# Altium PCB RGB_Ring_PCB.PcbDoc
Units mm, origin at the board's own origin, x right, y up, seen from the top; angles counter-clockwise.
Board outline 30.25 x 44.05 mm, 2 copper layers (Top Layer, Bottom Layer), stack 1.571 mm thick; 18 components, 12 nets, 57 pads, 6 vias.
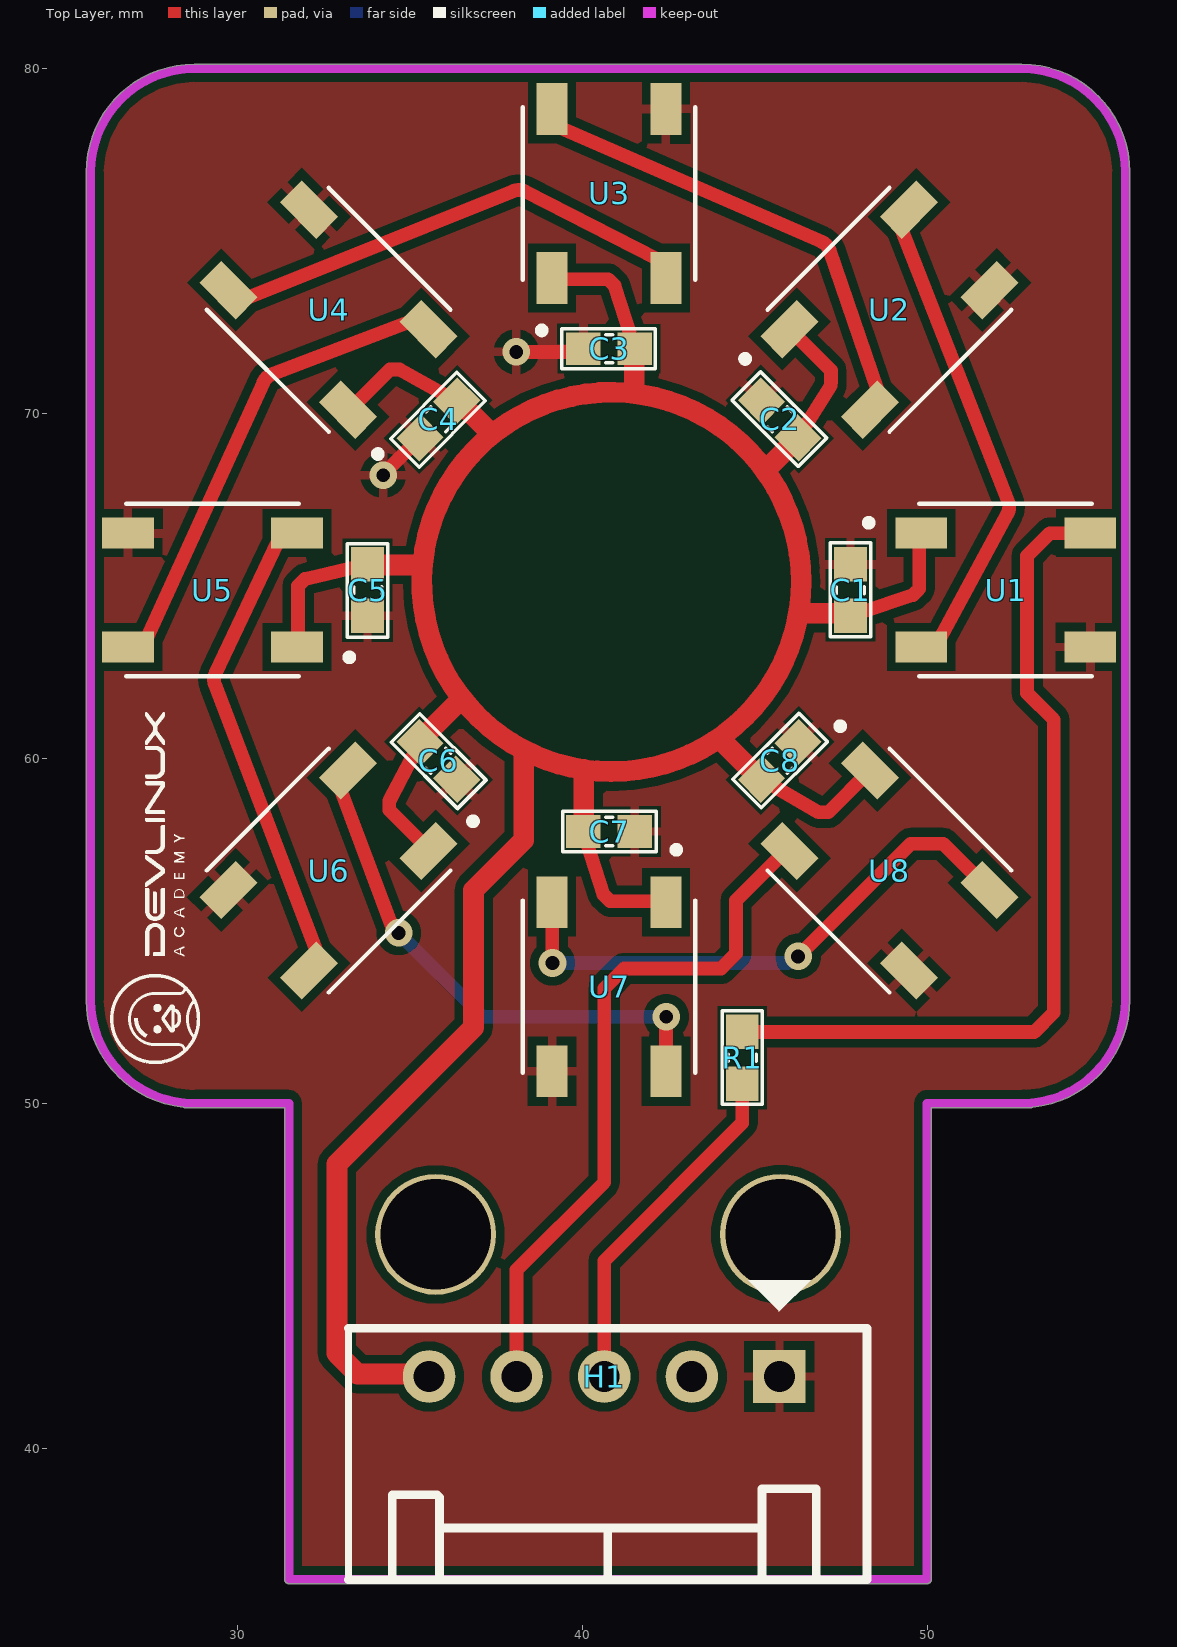
[diagram p0: Top Layer view]
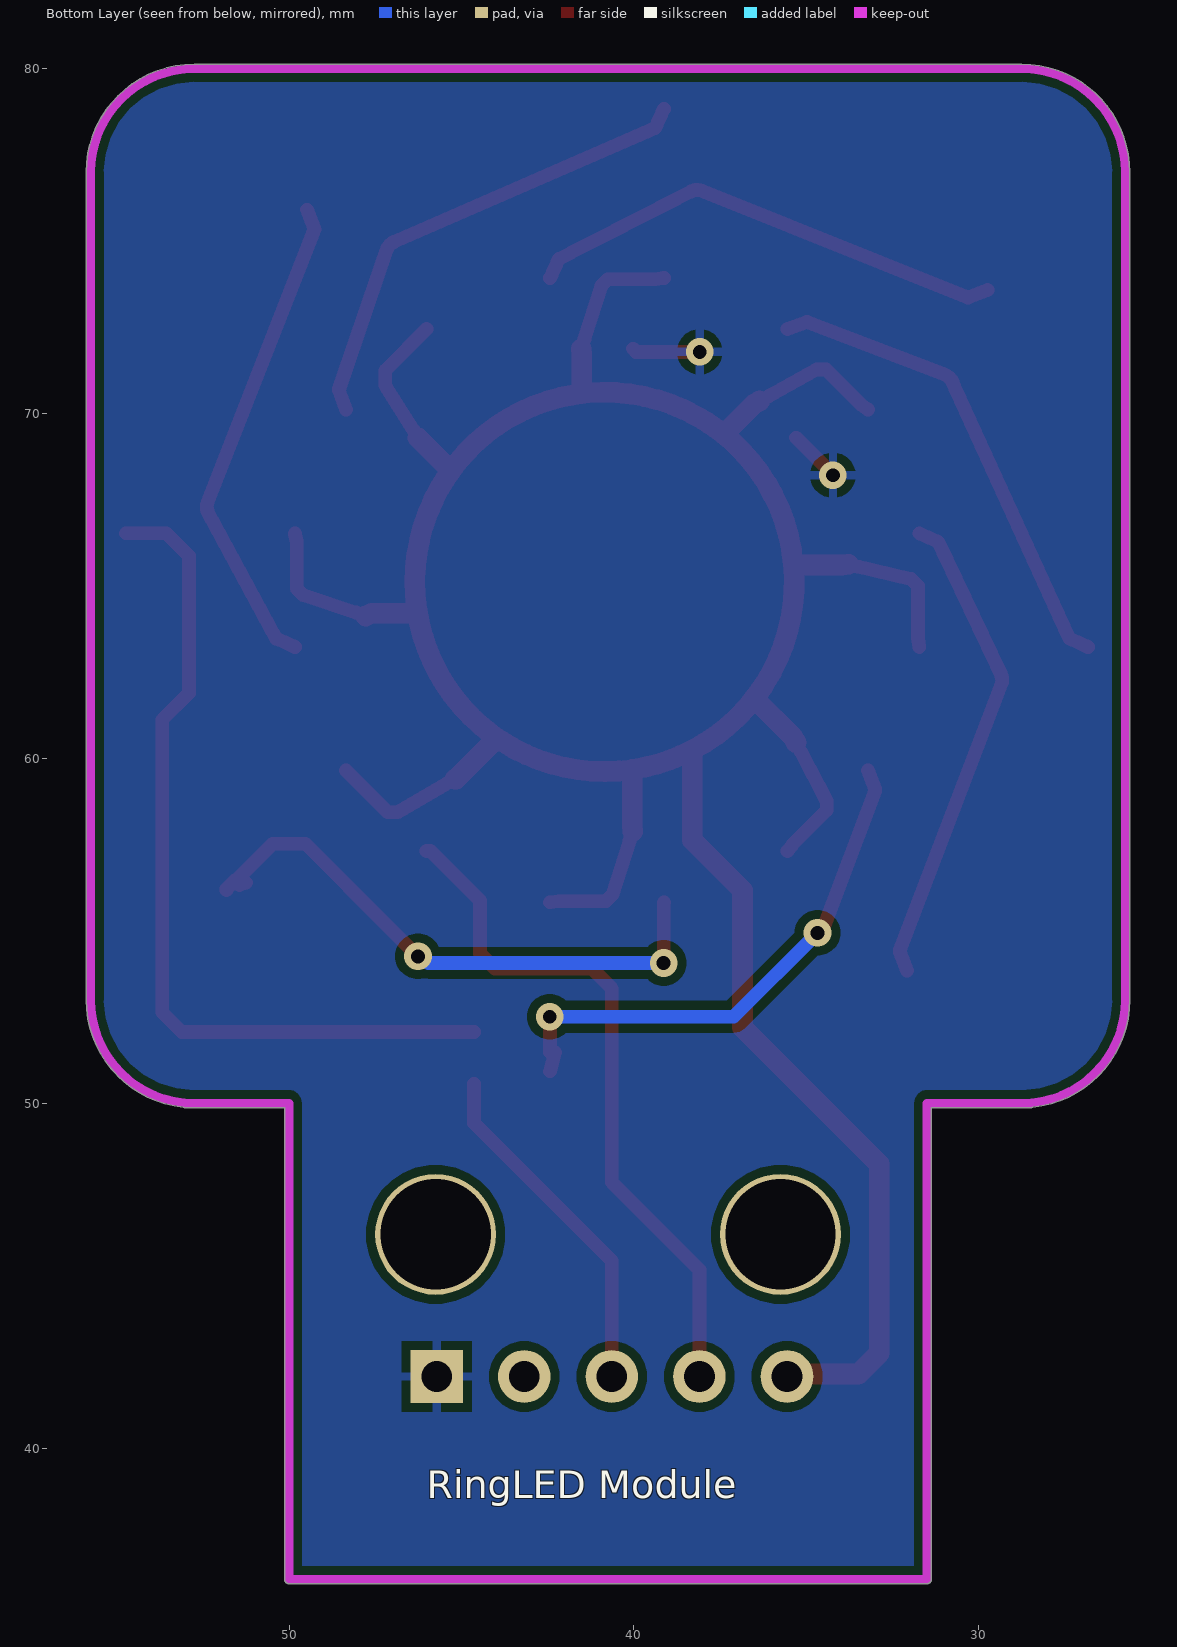
[diagram p1: Bottom Layer view, seen from below]
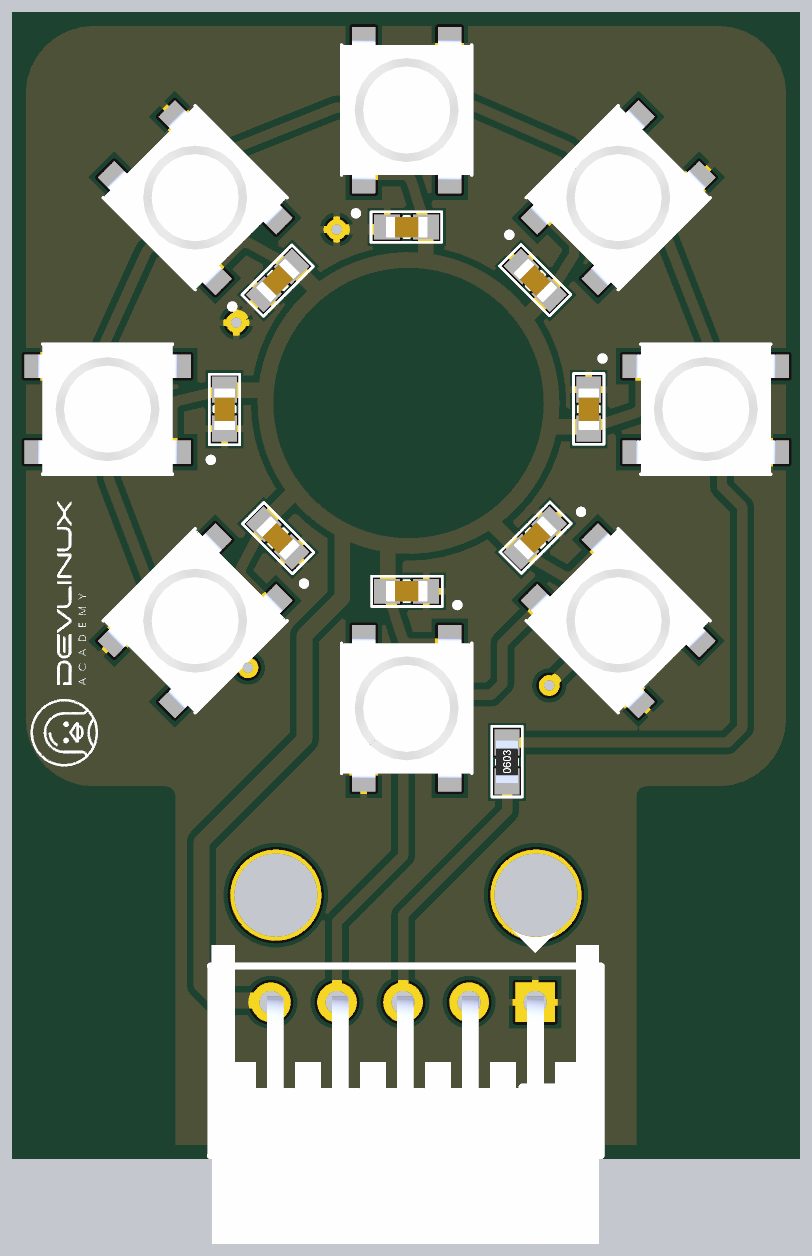
[diagram p2: 3D render of the assembled board from above, using the file's embedded part models]

## Layer stack, top to bottom
Top Solder: solder mask 0.0102, Solder Resist, Dk 3.5
Top Layer: signal copper 0.0356
Dielectric 1: dielectric 1.5, FR-4, Dk 4.8
Bottom Layer: signal copper 0.0356
Bottom Solder: solder mask 0.0102, Solder Resist, Dk 3.5

## Board outline
28.439,49.888 ccw(c28.5,50) 28.5,49.873 31.373,49.873 31.373,36.2 ccw(c31.5,36.2) 31.5,36.073 50,36.073 ccw(c50,36.2) 50.127,36.2 50.127,49.873 53,49.873 ccw(c53,50) 53.061,49.888 ccw(c52.75,53) 55.877,53 55.877,77 ccw(c52.75,77) 52.75,80.127 28.75,80.127 ccw(c28.75,77) 25.623,77 25.623,53 ccw(c28.75,53)

## Design rules (kind name [scope] priority, off if disabled: settings)
Clearance [All] p1: gap=0.254 ignorepadtopadclearanceinfootprint=FALSE
PolygonConnect [All] p1: connectstyle=Relief reliefconductorwidth=0.254 reliefentries=4 polygonreliefangle="90 Angle" airgapwidth=0.254
RoomDefinition RGB_Ring_SCH [InComponentClass('RGB_Ring_SCH')] p1: confinementstyle=ConfineIn formatcopy=TRUE lockcomponents=FALSE outline 366.776,188.849 401.828,188.849 401.828,208.153 366.776,208.153
RoutingVias [All] p1: holewidth=0.4 width=0.8 viastyle="Through Hole" minholewidth=0.3 minwidth=0.6 maxholewidth=0.5 maxwidth=1
SolderMaskExpansion [All] p1: expansion=0.102 istentingtop=FALSE
Width [All] p1: maxlimit=0.6 minlimit=0.254 preferedwidth=0.4
30 further rules are at their usual default settings.

## Components (designator, comment, footprint, x,y, rotation, side; value= is the part's Value field where it differs from the comment)
C1 "100nF" "tu 0603" 47.779,64.882 r90 top
C2 "100nF" "tu 0603" 45.729,69.832 r135 top
C3 "100nF" "tu 0603" 40.779,71.882 r180 top
C4 "100nF" "tu 0603" 35.829,69.832 r225 top
C5 "100nF" "tu 0603" 33.779,64.882 r270 top
C6 "100nF" "tu 0603" 35.829,59.932 r315 top
C7 "100nF" "tu 0603" 40.779,57.882 r0 top
C8 "100nF" "tu 0603" 45.729,59.932 r45 top
H1 "Header 5P 2.54 Duc Cong" "Header 5P DC 2.54" 45.72,42.08 r270 top
R1 "470R" "tro smd 0603" 44.64,51.32 r90 top
U1 "WS2812B-B" LED_WS2812B-B 52.279,64.882 r0 top
U2 "WS2812B-B" LED_WS2812B-B 48.911,73.014 r45 top
U3 "WS2812B-B" LED_WS2812B-B 40.779,76.382 r90 top
U4 "WS2812B-B" LED_WS2812B-B 32.647,73.014 r135 top
U5 "WS2812B-B" LED_WS2812B-B 29.279,64.882 r180 top
U6 "WS2812B-B" LED_WS2812B-B 32.647,56.75 r225 top
U7 "WS2812B-B" LED_WS2812B-B 40.779,53.382 r270 top
U8 "WS2812B-B" LED_WS2812B-B 48.911,56.75 r315 top

## Footprints (in the part's own frame and the unit in brackets; to place one, negate y for a bottom-side part, rotate by r counter-clockwise, add the part's x,y. Pads: shape width x height; smd on the part's side, far side on the other; paste and mask are expansions set on the pad)
"Header 5P DC 2.54" [mil]
  rect 60x60 hole 35: 1(0,0)
  round 60 hole 35: 2(0,-100) 3(0,-200) 4(0,-300) 5(0,-400)
  silkscreen extent -110,-492 232,100, body extent -87,-490 366,97, height 240
LED_WS2812B-B [mm]
  rect 1.5x0.9 smd: 1(-2.45,1.65) 2(-2.45,-1.65) 3(2.45,-1.65) 4(2.45,1.65)
  silkscreen extent -4.07,-2.5 2.5,2.5, body extent -2.7,-2.5 2.7,2.5, height 1.62
"tro smd 0603" [mm] "Chip Capacitor, 2-Leads, Body 1,60x0,80mm, IPC Medium Density"
  rect 1x0.95 smd mask+0.076: 1(-0.75,0) 2(0.75,0)
  silkscreen extent -1.35,-0.58 1.37,0.58, body extent -0.82,-0.42 0.82,0.43, height 0.44
"tu 0603" [mm] "Chip Capacitor, 2-Leads, Body 1,60x0,80mm, IPC Medium Density"
  rect 1x0.95 smd mask+0.076: 1(-0.75,0) 2(0.75,0)
  silkscreen extent -1.35,-0.58 1.37,0.58, body extent -0.8,-0.4 0.8,0.4, height 0.9

## Part data
C1 C2 C3 C4 C5 C6 C7 C8: library part "Tu 0603 104 50V 10%", "Dán", Chung_Loai=Dán, Don_Vi=Con, Ma_Hang=MH004568, So_Chan=2, Ten_Linh_Kien="Tụ 0603 104-100nF 10% 50V"
H1: "Cắm", Chung_Loai=Cắm, Don_Vi=Con, Ma_Hang=MH001308, Ten_Linh_Kien="Header 5P XH2.54-5P Đực Cong"
R1: library part "Tro 0603 5% 470R", "Dán", Chung_Loai=Dán, Don_Vi=Con, Ma_Hang=MH006328, So_Chan=2, Ten_Linh_Kien="Trở 0603 5% 470R"
U1 U2 U3 U4 U5 U6 U7 U8: "Intelligent control LED integrated light source", Package=None, Availability=Unavailable, MP=WS2812B-B, Price=None

## Free pads (board coordinates)
  round 3.5 hole 3.2: 9(35.75,46.2) 9(45.75,46.2)

## Via types
v1: diameter 0.8, hole 0.4, Top Layer to Bottom Layer, 6 vias

## Nets (pads, with @x,y where several pads share a name; then routed paths per layer and width w, separated by ;. In a path a pad name is that pad's centre, name@x,y a point inside that pad or via, vN(x,y) a via of type N, cw(c..) or ccw(c..) an arc to the next point about the centre after c; other vN are vias at no path point)
+5: C1.1 C2.1 C3.1 C4.1 C5.1 C6.1 C7.1 C8.1 H1.5 U1.1 U2.1 U3.1 U4.1 U5.1 U6.1 U7.1 U8.1 | length 100.2
  Top Layer w0.4: U5.1 31.762,63.482 31.762,65.002 31.879,65.119 31.96,65.2 32.069,65.226 cw(c32.162,64.837) 32.071,65.226 33.475,65.56 33.504,65.56 C5.1 ; U4.1 33.419,70.262 34.432,71.275 34.7,71.275 36.084,70.514 36.103,70.495 C4.1 ; C6.1 35.17,60.202 35.152,60.185 34.406,58.768 34.406,58.503 34.523,58.386 35.393,57.516 U6.1 ; U3.1 39.379,73.898 40.753,73.898 40.87,73.781 40.939,73.713 41.433,72.181 41.433,72.157 C3.1 ; C7.1 40.125,57.607 40.125,57.584 40.621,56.048 40.689,55.98 40.807,55.863 42.179,55.863 U7.1 ; C8.1 45.45,59.264 45.469,59.245 46.861,58.438 47.134,58.438 U8.1 ; U2.1 47.152,71.308 47.212,71.248 47.212,70.917 47.208,70.812 46.426,69.567 46.405,69.545 C2.1 ; C1.1 48.054,64.231 48.077,64.231 49.589,64.735 49.656,64.801 49.773,64.919 49.773,66.282 U1.1
  Top Layer w0.6: C5.1 33.954,65.61 35.32,65.61 ; C6.1 35.389,60.619 36.5,61.73 ; H1.5 35.488,42.152 33.488,42.152 32.89,42.75 32.89,48.24 36.85,52.2 36.85,56.18 38.305,57.635 38.305,60.244 ; C4.1 36.517,70.273 37.36,69.43 ; C7.1 40.05,58.057 40.05,59.678 ; 41.51,70.62 41.51,71.707 C3.1 ; 44.028,60.532 45.158,59.402 C8.1 ; 45.36,68.4 46.137,69.177 C2.1 ; 46.29,64.21 47.604,64.21 C1.1 ; 46.335,65.524 cw(c40.85,65.12) 40.05,59.678 ; 46.335,65.531 ccw(c40.85,65.12) 38.305,60.244 ; 38.305,60.244 ccw(c40.85,65.12) 40.05,59.678
D_IN: H1.3 R1.1 | length 10.1
  Top Layer w0.4: H1.3 40.64,45.43 44.64,49.43 R1.1
D_OUT: H1.4 U8.2 | length 20.2
  Top Layer w0.4: H1.4 38.1,45.17 40.64,47.71 40.64,53.33 41.22,53.91 44.03,53.91 44.46,54.34 44.46,55.88 45.896,57.316 U8.2
GND: C1.2 C2.2 C3.2 C4.2 C5.2 C6.2 C7.2 C8.2 H1.1 U1.3 U2.3 U3.3 U4.3 U5.3 U6.3 U7.3 U8.3 | length 3.5
  Top Layer w0.4: v1(34.23,68.21) 34.23,68.233 C4.2 ; v1(38.09,71.79) 39.937,71.79 C3.2
NetR1_2: R1.2 U1.4 | length 24.9
  Top Layer w0.4: R1.2 53.11,52.07 53.675,52.635 53.675,61.125 52.9,61.9 52.9,65.87 53.562,66.532 U1.4
NetU1_2: U1.2 U2.4 | length 14.2
  Top Layer w0.4: U2.4 49.265,75.348 52.355,67.441 cw(c51.983,67.295) 52.335,67.105 50.379,63.482 U1.2
NetU2_2: U2.2 U3.4 | length 14.1
  Top Layer w0.4: U3.4 39.379,78.282 46.95,74.978 46.952,74.978 cw(c46.791,74.612) 47.169,74.741 48.557,70.681 U2.2
NetU3_2: U3.2 U4.4 | length 14.2
  Top Layer w0.4: U4.4 30.314,73.368 38.013,76.455 cw(c38.162,76.084) 38.344,76.44 42.179,74.482 U3.2
NetU4_2: U4.2 U5.4 | length 14
  Top Layer w0.4: U5.4 27.379,63.482 30.764,70.922 cw(c31.128,70.757) 30.985,71.13 34.98,72.661 U4.2
NetU5_2: U5.2 U6.4 | length 14
  Top Layer w0.4: 29.348,62.142 cw(c29.722,62.284) 29.361,62.456 31.179,66.282 U5.2 ; 29.348,62.142 32.293,54.417 U6.4
NetU6_2: U6.2 U7.4 | length 15.6
  Top Layer w0.4: U6.2 33.001,59.084 34.471,55.165 ccw(c34.845,55.306) v1(34.676,54.943) ; U7.4 42.286,51.482 42.434,51.482 42.434,52.504 v1(42.44,52.51)
  Bottom Layer w0.4: v1(34.676,54.943) 37.11,52.51 v1(42.44,52.51)
NetU7_2: U7.2 U8.4 | length 16.6
  Top Layer w0.4: U7.2 39.134,55.827 39.134,54.076 v1(39.14,54.07) ; v1(46.26,54.26) 47.075,55.075 49.53,57.53 50.465,57.53 U8.4@51.552,56.442 ; U8.4@51.244,56.397 U8.4@51.435,56.325 ; U8.4@51.57,56.46 51.81,56.22 U8.4
  Bottom Layer w0.4: v1(39.14,54.07) 45.962,54.07 46.152,54.26 v1(46.26,54.26)
pads on no net: H1.2

## Polygon pours and split planes (outlines as drawn)
GND on Top Layer "GND_L01_P000" (solid, remove dead copper, pour order 0): 19.52,82.79 19.59,82.86 66.88,82.86 66.88,38.29 57.69,29.1 18.49,29.1
GND on Bottom Layer "GND_L02_P001" (solid, remove dead copper, pour order 1): 21.41,82.82 64.41,82.82 65.39,81.84 62.79,79.24 62.79,31.56 25.37,31.56 24.56,32.37

## Keep-outs
Keep-Out Layer:
  lines w0.254: 28.5,50 31.5,50 31.5,36.2 50,36.2 50,50 53,50 ; 28.75,50 cw(c28.75,53) 25.75,53 25.75,77 cw(c28.75,77) 28.75,80 52.75,80 cw(c52.75,77) 55.75,77 55.75,53 cw(c52.75,53) 52.75,50

## Silkscreen, mask and mechanical layers (free items; w line width, h text height)
Top Overlay:
  drawing of 21 lines, arcs and shapes, not listed
Bottom Overlay:
  text "RingLED Module" at 46,38.547 h0.8